# Altium PCB BBB_Board_Sandbox.PcbDoc
Units mil, origin at the board's own origin, x right, y up, seen from the top; angles counter-clockwise.
Board outline 11000 x 5000 mil, 2 copper layers (Top Layer, Bottom Layer); 106 components, 380 nets, 1052 pads, 0 vias.
Unrouted connection lines stored in the file: 662.
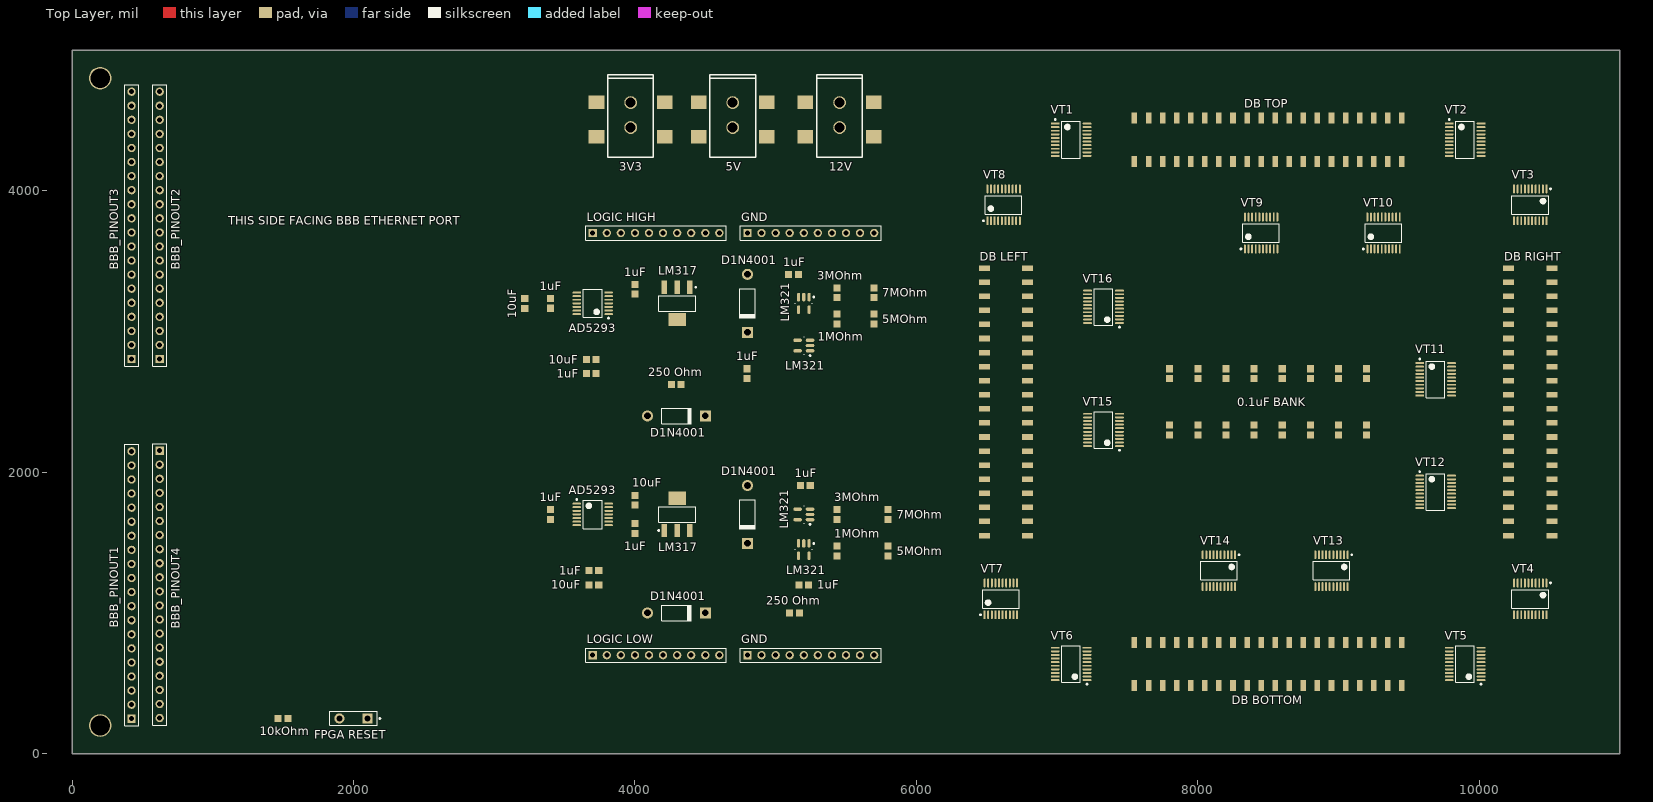
[diagram p0: Top Layer view]
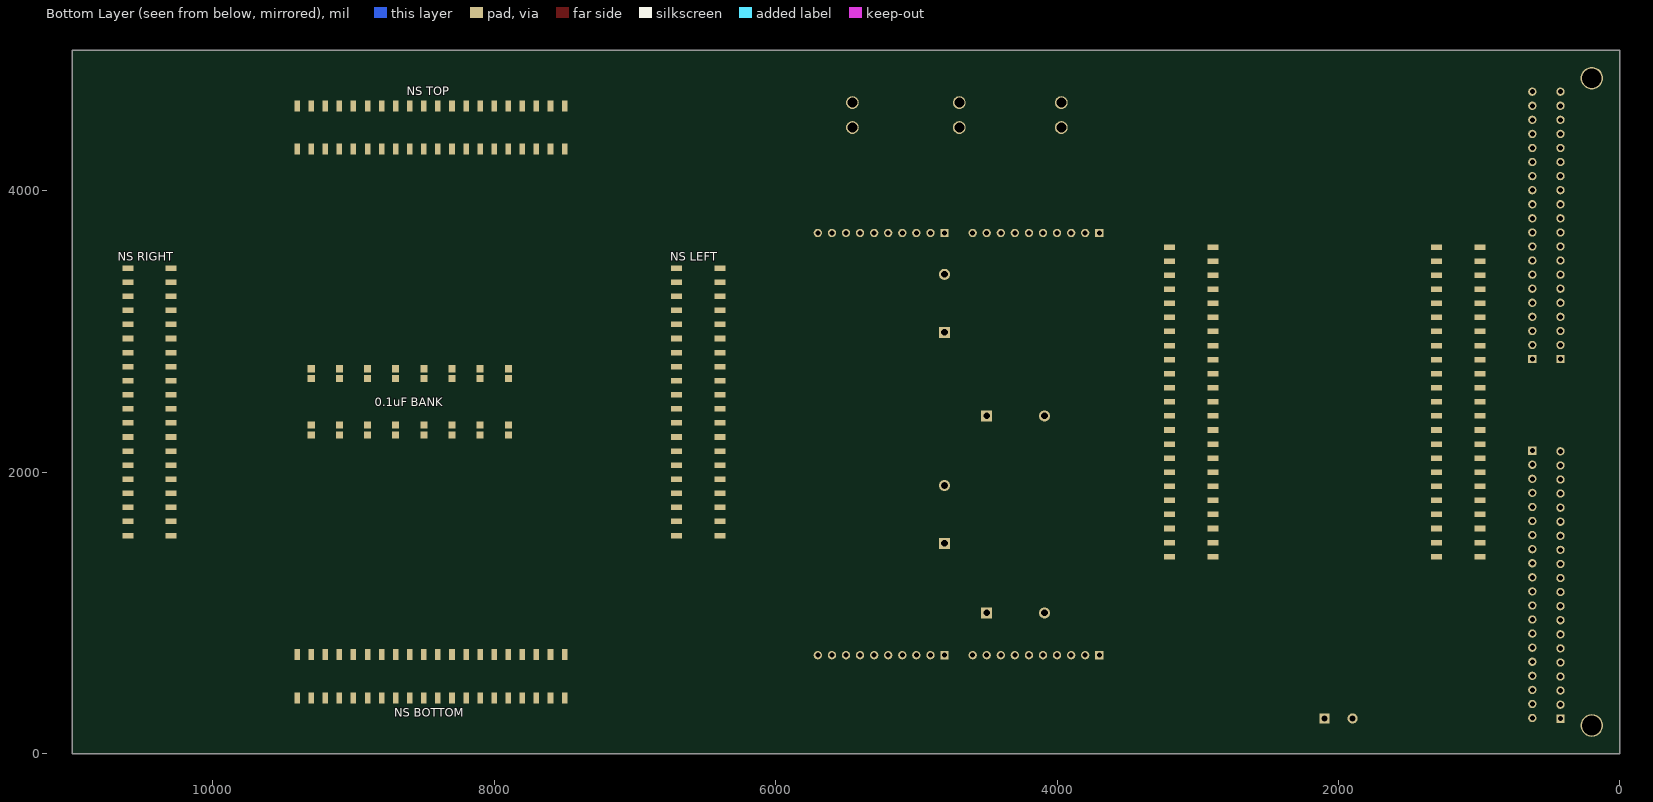
[diagram p1: Bottom Layer view, seen from below]

## Layer stack, top to bottom
Top Solder: solder mask 0.4, Solder Resist, Dk 3.5
Top Layer: signal copper 1.4
Dielectric 1: dielectric 12.6, FR-4, Dk 4.8
Bottom Layer: signal copper 1.4
Bottom Solder: solder mask 0.4, Solder Resist, Dk 3.5

## Board outline
0,0 11000,0 11000,5000 0,5000

## Design rules (kind name [scope] priority, off if disabled: settings)
Clearance DifferentViaPadClearance [IsPad vs IsVia] p1: gap=20
Clearance SameViaPadClearance [IsPad vs IsVia] p2: gap=20
Clearance DifferentViaViaClearance [IsVia vs IsVia] p3: gap=20
Clearance SameViaViaClearance [All] p4: gap=10
Clearance DifferentGeneralClearance [All] p5: gap=10
Clearance SameGeneralClearance [IsVia vs IsVia] p6: gap=20
HoleSize [All] p1: absolutevalues=TRUE maxlimit=150 minlimit=15 maxpercent=80.000 minpercent=20.000
MinimumAnnularRing [All] p1: minimumring=7
MinimumSolderMaskSliver [All] p1: minsoldermaskwidth=4
PolygonConnect [All] p1: connectstyle=Relief reliefconductorwidth=10 reliefentries=4 polygonreliefangle="90 Angle" airgapwidth=10
RoutingCorners [All] p1: cornerstyle=45-Degree minsetback=50 maxsetback=50
RoutingVias [All] p1: holewidth=15 width=30 viastyle="Through Hole" minholewidth=15 minwidth=30 maxholewidth=15 maxwidth=30
SolderMaskExpansion [All] p1: expansion=4
Width [All] p1: maxlimit=7 minlimit=7 preferedwidth=7
27 further rules are at their usual default settings.

## Classes and differential pairs
component class BBB_Board: 3V3 5V 10kOhm 12V BBB_PINOUT1 BBB_PINOUT2 BBB_PINOUT3 BBB_PINOUT4 "FPGA RESET" GND GND1 "LOGIC HIGH" "LOGIC LOW" ""
component class U_Power_Control1: 1MOhm 1uF 3MOhm 10uF "250 Ohm" AD5293 D1N4001 d2 LM321
component class U_Power_Control2: 1MOhm 1uF 3MOhm 10uF "250 Ohm" AD5293 D1N4001 LM317 LM321
component class U_VT_WRP1: VT11 ""
component class U_VT_WRP2: 0.1uF_3_U_VT_WRP2 LT1_U_VT_WRP2 LT2_U_VT_WRP2 ""
component class U_VT_WRP3: LT1_U_VT_WRP3 LT2_U_VT_WRP3 ""
component class U_VT_WRP4: LT1_U_VT_WRP4 LT2_U_VT_WRP4 ""
component class U_VT_WRP5: LT1_U_VT_WRP5 LT2_U_VT_WRP5 ""
component class U_VT_WRP6: 0.1uF_1_U_VT_WRP6 LT1_U_VT_WRP6 LT2_U_VT_WRP6 ""
component class U_VT_WRP7: LT1_U_VT_WRP7 LT2_U_VT_WRP7 ""
component class U_VT_WRP8: LT1_U_VT_WRP8 LT2_U_VT_WRP8 ""
net class IVL_B[127..0]: IVL_B0 IVL_B1 IVL_B2 IVL_B3 IVL_B4 IVL_B5 IVL_B6 IVL_B7 IVL_B8 IVL_B9 IVL_B10 IVL_B11 IVL_B12 IVL_B13 IVL_B14 IVL_B15 IVL_B16 IVL_B17 IVL_B18 IVL_B19 IVL_B20 IVL_B21 IVL_B22 IVL_B23 IVL_B24 IVL_B25 IVL_B26 IVL_B27 IVL_B28 IVL_B29 IVL_B30 IVL_B31 IVL_B32 IVL_B33 IVL_B34 IVL_B35 IVL_B36 IVL_B37 IVL_B38 IVL_B39 IVL_B40 IVL_B41 IVL_B42 IVL_B43 IVL_B44 IVL_B45 IVL_B46 IVL_B47 IVL_B48 IVL_B49 IVL_B50 IVL_B51 IVL_B52 IVL_B53 IVL_B54 IVL_B55 IVL_B56 IVL_B57 IVL_B58 IVL_B59 IVL_B60 IVL_B61 IVL_B62 IVL_B63 IVL_B64 IVL_B65 IVL_B66 IVL_B67 IVL_B68 IVL_B69 IVL_B70 IVL_B71 IVL_B72 IVL_B73 IVL_B74 IVL_B75 IVL_B76 IVL_B77 IVL_B78 IVL_B79 IVL_B80 IVL_B81 IVL_B82 IVL_B83 IVL_B84 IVL_B85 IVL_B86 IVL_B87 IVL_B88 IVL_B89 IVL_B90 IVL_B91 IVL_B92 IVL_B93 IVL_B94 IVL_B95 IVL_B96 IVL_B97 IVL_B98 IVL_B99 IVL_B100 IVL_B101 IVL_B102 IVL_B103 IVL_B104 IVL_B105 IVL_B106 IVL_B107 IVL_B108 IVL_B109 IVL_B110 IVL_B111 IVL_B112 IVL_B113 IVL_B114 IVL_B115 IVL_B116 IVL_B117 IVL_B118 IVL_B119 IVL_B120 IVL_B121 IVL_B122 IVL_B123 IVL_B124 IVL_B125 IVL_B126 IVL_B127
net class OVCC_B[127..0]: OVCC_B0 OVCC_B1 OVCC_B2 OVCC_B3 OVCC_B4 OVCC_B5 OVCC_B6 OVCC_B7 OVCC_B8 OVCC_B9 OVCC_B10 OVCC_B11 OVCC_B12 OVCC_B13 OVCC_B14 OVCC_B15 OVCC_B16 OVCC_B17 OVCC_B18 OVCC_B19 OVCC_B20 OVCC_B21 OVCC_B22 OVCC_B23 OVCC_B24 OVCC_B25 OVCC_B26 OVCC_B27 OVCC_B28 OVCC_B29 OVCC_B30 OVCC_B31 OVCC_B32 OVCC_B33 OVCC_B34 OVCC_B35 OVCC_B36 OVCC_B37 OVCC_B38 OVCC_B39 OVCC_B40 OVCC_B41 OVCC_B42 OVCC_B43 OVCC_B44 OVCC_B45 OVCC_B46 OVCC_B47 OVCC_B48 OVCC_B49 OVCC_B50 OVCC_B51 OVCC_B52 OVCC_B53 OVCC_B54 OVCC_B55 OVCC_B56 OVCC_B57 OVCC_B58 OVCC_B59 OVCC_B60 OVCC_B61 OVCC_B62 OVCC_B63 OVCC_B64 OVCC_B65 OVCC_B66 OVCC_B67 OVCC_B68 OVCC_B69 OVCC_B70 OVCC_B71 OVCC_B72 OVCC_B73 OVCC_B74 OVCC_B75 OVCC_B76 OVCC_B77 OVCC_B78 OVCC_B79 OVCC_B80 OVCC_B81 OVCC_B82 OVCC_B83 OVCC_B84 OVCC_B85 OVCC_B86 OVCC_B87 OVCC_B88 OVCC_B89 OVCC_B90 OVCC_B91 OVCC_B92 OVCC_B93 OVCC_B94 OVCC_B95 OVCC_B96 OVCC_B97 OVCC_B98 OVCC_B99 OVCC_B100 OVCC_B101 OVCC_B102 OVCC_B103 OVCC_B104 OVCC_B105 OVCC_B106 OVCC_B107 OVCC_B108 OVCC_B109 OVCC_B110 OVCC_B111 OVCC_B112 OVCC_B113 OVCC_B114 OVCC_B115 OVCC_B116 OVCC_B117 OVCC_B118 OVCC_B119 OVCC_B120 OVCC_B121 OVCC_B122 OVCC_B123 OVCC_B124 OVCC_B125 OVCC_B126 OVCC_B127
channel class DUT_HEADER: U_DUT_HEADER1 U_DUT_HEADER2 U_DUT_HEADER3 U_DUT_HEADER4
channel class POW_CONT: U_Power_Control1 U_Power_Control2
channel class VT_WRP: U_VT_WRP1 U_VT_WRP2 U_VT_WRP3 U_VT_WRP4 U_VT_WRP5 U_VT_WRP6 U_VT_WRP7 U_VT_WRP8
component class U_NUMATO_HDR: "NS BOTTOM" "NS LEFT" "NS RIGHT" "NS TOP"

## Components (designator, comment, footprint, x,y, rotation, side; value= is the part's Value field where it differs from the comment)
0.1uF_0 "0.1uF_0603" 0.1UF_0603 8300,2300 r270 bottom
0.1uF_0 "0.1uF_0603" 0.1UF_0603 9300,2300 r270 bottom
0.1uF_0 "0.1uF_0603" 0.1UF_0603 8900,2300 r270 bottom
0.1uF_0 "0.1uF_0603" 0.1UF_0603 8100,2700 r90 bottom
0.1uF_0 "0.1uF_0603" 0.1UF_0603 8700,2300 r270 bottom
0.1uF_0 "0.1uF_0603" 0.1UF_0603 8500,2300 r270 bottom
0.1uF_0 "0.1uF_0603" 0.1UF_0603 8100,2300 r270 bottom
0.1uF_0 "0.1uF_0603" 0.1UF_0603 7900,2300 r270 bottom
0.1uF_1 "0.1uF_0603" 0.1UF_0603 9300,2700 r90 bottom
0.1uF_1 "0.1uF_0603" 0.1UF_0603 9100,2700 r90 bottom
0.1uF_1 "0.1uF_0603" 0.1UF_0603 9100,2300 r270 bottom
0.1uF_1 "0.1uF_0603" 0.1UF_0603 8900,2700 r90 bottom
0.1uF_1 "0.1uF_0603" 0.1UF_0603 8700,2700 r90 bottom
0.1uF_1 "0.1uF_0603" 0.1UF_0603 8500,2700 r90 bottom
0.1uF_1 "" 0.1UF_0603 8300,2700 r90 bottom
0.1uF_1 "0.1uF_0603" 0.1UF_0603 7900,2700 r90 bottom
0.1uF_3 "0.1uF_0603" 0.1UF_0603 8800,2700 r90 top
0.1uF_3 "0.1uF_0603" 0.1UF_0603 9200,2300 r270 top
0.1uF_3 "0.1uF_0603" 0.1UF_0603 8600,2700 r90 top
0.1uF_3 "0.1uF_0603" 0.1UF_0603 9000,2300 r270 top
0.1uF_3 "0.1uF_0603" 0.1UF_0603 8800,2300 r270 top
0.1uF_3 "0.1uF_0603" 0.1UF_0603 8600,2300 r270 top
0.1uF_3 "0.1uF_0603" 0.1UF_0603 9000,2700 r90 top
0.1uF_3 "0.1uF_0603" 0.1UF_0603 8200,2700 r90 top
0.1uF_4 "0.1uF_0603" 0.1UF_0603 8400,2300 r270 top
0.1uF_4 "0.1uF_0603" 0.1UF_0603 8200,2300 r270 top
0.1uF_4 "0.1uF_0603" 0.1UF_0603 8400,2700 r90 top
0.1uF_4 "0.1uF_0603" 0.1UF_0603 8000,2300 r270 top
0.1uF_4 "0.1uF_0603" 0.1UF_0603 7800,2300 r270 top
0.1uF_4 "0.1uF_0603" 0.1UF_0603 7800,2700 r90 top
0.1uF_4 "0.1uF_0603" 0.1UF_0603 9200,2700 r270 top
0.1uF_4 "0.1uF_0603" 0.1UF_0603 8000,2700 r90 top
1MOhm "RNCS0603BKE10K0" 0.1UF_0603 5435,1440 r90 top (schematic designator R4)
1MOhm "RNCS0603BKE10K0" 0.1UF_0603 5435,3089 r90 top (schematic designator R4)
1uF "0.1uF_0603" 0.1UF_0603 5200,1200 r180 top (schematic designator 1)
1uF "0.1uF_0603" 0.1UF_0603 4795,2700 r270 top (schematic designator 1)
1uF "0.1uF_0603" 0.1UF_0603 5211,1906 r180 top (schematic designator 2)
1uF "0.1uF_0603" 0.1UF_0603 5128,3406 r180 top (schematic designator 2)
1uF "0.1uF_0603" 0.1UF_0603 3708,1300 r180 top (schematic designator 3)
1uF "0.1uF_0603" 0.1UF_0603 3690,2700 r180 top (schematic designator 4)
1uF "0.1uF_0603" 0.1UF_0603 3400,1700 r270 top (schematic designator 5)
1uF "0.1uF_0603" 0.1UF_0603 4000,3300 r90 top (schematic designator 5)
1uF "0.1uF_0603" 0.1UF_0603 4000,1600 r270 top (schematic designator 6)
1uF "0.1uF_0603" 0.1UF_0603 3400,3200 r90 top (schematic designator 6)
3MOhm "RNCS0603BKE10K0" 0.1UF_0603 5435,1700 r90 top (schematic designator R3)
3MOhm "RNCS0603BKE10K0" 0.1UF_0603 5435,3275 r90 top (schematic designator R3)
3V3 "PJ-002BH-SMT-TR" CP-002BHPJCT-ND 4147,4823 r180 top
5MOhm "RNCS0603BKE10K0" 0.1UF_0603 5800,1440 r270 top (schematic designator R5)
5MOhm "RNCS0603BKE10K0" 0.1UF_0603 5700,3089 r270 top (schematic designator R5)
5V "PJ-002BH-SMT-TR" CP-002BHPJCT-ND 4872,4823 r180 top (schematic designator -5V)
7MOhm "RNCS0603BKE10K0" 0.1UF_0603 5800,1700 r270 top (schematic designator R6)
7MOhm "RNCS0603BKE10K0" 0.1UF_0603 5700,3275 r270 top (schematic designator R6)
10kOhm "RNCS0603BKE10K0" 0.1UF_0603 1500,250 r0 top (schematic designator R1)
10uF "0.1uF_0603" 0.1uF_0603 3217,3199 r90 top (schematic designator 1uF_5)
10uF "0.1uF_0603" 0.1uF_0603 4001,1801 r270 top (schematic designator 1uF_5)
10uF "0.1uF_0603" 0.1UF_0603 3690,2800 r180 top (schematic designator 3)
10uF "0.1uF_0603" 0.1UF_0603 3708,1200 r180 top (schematic designator 4)
12V "PJ-002BH-SMT-TR" CP-002BHPJCT-ND 5632,4823 r180 top (schematic designator 12V.)
"250 Ohm" "RNCS0603BKE10K0" 0.1UF_0603 5133,1000 r180 top (schematic designator R2)
"250 Ohm" "RNCS0603BKE10K0" 0.1UF_0603 4294,2622 r0 top (schematic designator R2)
AD5293 "Digital Pot" DIG_POT 3700,1700 r0 top (schematic designator POT)
AD5293 "Digital Pot" DIG_POT 3700,3200 r180 top (schematic designator POT)
BBB_DOWN "BBB_Pin" BBB_PIN 3200,3600 r180 bottom
BBB_PINOUT1 "Header 20" HDR1X20 423,248 r90 top
BBB_PINOUT2 "Header 20" HDR1X20 623,2804 r90 top
BBB_PINOUT3 "Header 20" HDR1X20 423,2804 r90 top
BBB_PINOUT4 "Header 20" HDR1X20 623,2153 r270 top
D1N4001 "Diode 1N4001" DO-41 4800,1700 r270 top (schematic designator D1)
D1N4001 "Diode 1N4001" DO-41 4800,3200 r270 top (schematic designator D1)
D1N4001 "Diode 1N4001" DO-41 4295,1000 r0 top (schematic designator D2)
D1N4001 "Diode 1N4001" DO-41 4295,2400 r0 top (schematic designator D2)
"DB BOTTOM" "ADAFRUIT_HEADER" FEMALE_HEADER_SMD 8500,637.5 r0 top (schematic designator DUT1)
"DB LEFT" "ADAFRUIT_HEADER" FEMALE_HEADER_SMD 6637.5,2500 r270 top (schematic designator DUT1)
"DB RIGHT" "ADAFRUIT_HEADER" FEMALE_HEADER_SMD 10362.5,2500 r90 top (schematic designator DUT1)
"DB TOP" "ADAFRUIT_HEADER" FEMALE_HEADER_SMD 8500,4362.5 r180 top (schematic designator DUT1)
"FPGA RESET" "SW-PB" SPST-2 2000,250 r180 top (schematic designator S1)
GND "Header 10" HDR1X10 4800,3700 r0 top (schematic designator GND2)
GND "Header 10" HDR1X10 4800,700 r0 top (schematic designator GND1)
LM317 "Voltage Regulator" VOLT_REG 4300,1700 r90 top (schematic designator VR1)
LM317 "Voltage Regulator" VOLT_REG 4300,3200 r270 top (schematic designator VR1)
LM321 "LM321MF/NOPB" OP_AMP 5200,1700 r180 top (schematic designator LM1)
LM321 "LM321MF/NOPB" OP_AMP 5200,3200 r270 top (schematic designator LM1)
LM321 "LM321MF/NOPB" OP_AMP 5200,2900 r180 top (schematic designator LM2)
LM321 "LM321MF/NOPB" OP_AMP 5200,1450 r270 top (schematic designator LM2)
"LOGIC HIGH" "Header 10" HDR1X10 3700,3700 r0 top (schematic designator LOGIC_HIGH)
"LOGIC LOW" "Header 10" HDR1X10 3700,700 r0 top (schematic designator P1)
"NS BOTTOM" "ADAFRUIT_HEADER" FEMALE_HEADER_SMD 8450,550 r0 bottom (schematic designator ETH3)
"NS LEFT" "ADAFRUIT_HEADER" FEMALE_HEADER_SMD 6550,2500 r90 bottom (schematic designator ETH2)
"NS RIGHT" "ADAFRUIT_HEADER" FEMALE_HEADER_SMD 10450,2500 r270 bottom (schematic designator ETH4)
"NS TOP" "ADAFRUIT_HEADER" FEMALE_HEADER_SMD 8450,4450 r180 bottom (schematic designator ETH1)
VT1 "8-Chanel Level Translator" 8-BIT_LEVEL 7100,4362.5 r0 top (schematic designator LT1)
VT2 "8-Chanel Level Translator" 8-BIT_LEVEL 9900,4362.5 r0 top (schematic designator LT2)
VT3 "8-Chanel Level Translator" 8-BIT_LEVEL 10362.5,3900 r270 top (schematic designator LT2)
VT4 "8-Chanel Level Translator" 8-BIT_LEVEL 10362.5,1100 r270 top (schematic designator LT1)
VT5 "8-Chanel Level Translator" 8-BIT_LEVEL 9900,637.5 r180 top (schematic designator LT1)
VT6 "8-Chanel Level Translator" 8-BIT_LEVEL 7100,637.5 r180 top (schematic designator LT2)
VT7 "8-Chanel Level Translator" 8-BIT_LEVEL 6600,1100 r90 top (schematic designator LT2)
VT8 "8-Chanel Level Translator" 8-BIT_LEVEL 6620,3900 r90 top (schematic designator LT1)
VT9 "8-Chanel Level Translator" 8-BIT_LEVEL 8450,3700 r90 top (schematic designator LT1)
VT10 "8-Chanel Level Translator" 8-BIT_LEVEL 9320,3700 r90 top (schematic designator LT2)
VT11 "8-Chanel Level Translator" 8-BIT_LEVEL 9690,2660 r0 top (schematic designator LT1)
VT12 "8-Chanel Level Translator" 8-BIT_LEVEL 9690,1860 r0 top (schematic designator LT2)
VT13 "8-Chanel Level Translator" 8-BIT_LEVEL 8950,1300 r270 top (schematic designator LT1)
VT14 "8-Chanel Level Translator" 8-BIT_LEVEL 8150,1300 r270 top (schematic designator LT2)
VT15 "8-Chanel Level Translator" 8-BIT_LEVEL 7330,2300 r180 top (schematic designator LT1)
VT16 "8-Chanel Level Translator" 8-BIT_LEVEL 7330,3175 r180 top (schematic designator LT2)

## Footprints (in the part's own frame and the unit in brackets; to place one, negate y for a bottom-side part, rotate by r counter-clockwise, add the part's x,y. Pads: shape width x height; smd on the part's side, far side on the other; paste and mask are expansions set on the pad)
0.1UF_0603 [mil]
  rect 50x50 smd: 1(-35,0) 2(35,0)
0.1uF_0603 [mil]
  rect 50x50 smd: 1(-35,0) 2(35,0)
8-BIT_LEVEL [mm]
  oval 1.6x0.35 smd: 1(-2.875,2.925) 2(-2.875,2.275) 3(-2.875,1.625) 4(-2.875,0.975) 5(-2.875,0.325) 6(-2.875,-0.325) 7(-2.875,-0.975) 8(-2.875,-1.625) 9(-2.875,-2.275) 10(-2.875,-2.925) 11(2.875,-2.925) 12(2.875,-2.275) 13(2.875,-1.625) 14(2.875,-0.975) 15(2.875,-0.325) 16(2.875,0.325) 17(2.875,0.975) 18(2.875,1.625) 19(2.875,2.275) 20(2.875,2.925)
  silkscreen extent -3,-3.3 1.67,3.77, body extent -2.25,-3.3 2.25,3.3, height 1.1
BBB_PIN [mm]
  rect 2x1 smd: 1(55.986,0) 2(48.186,0) 3(55.986,-2.54) 4(48.186,-2.54) 5(55.986,-5.08) 6(48.186,-5.08) 7(55.986,-7.62) 8(48.186,-7.62) 9(55.986,-10.16) 10(48.186,-10.16) 11(55.986,-12.7) 12(48.186,-12.7) 13(55.986,-15.24) 14(48.186,-15.24) 15(55.986,-17.78) 16(48.186,-17.78) 17(55.986,-20.32) 18(48.186,-20.32) 19(55.986,-22.86) 20(48.186,-22.86) 21(55.986,-25.4) 22(48.186,-25.4) 23(55.986,-27.94) 24(48.186,-27.94) 25(55.986,-30.48) 26(48.186,-30.48) 27(55.986,-33.02) 28(48.186,-33.02) 29(55.986,-35.56) 30(48.186,-35.56) 31(55.986,-38.1) 32(48.186,-38.1) 33(55.986,-40.64) 34(48.186,-40.64) 35(55.986,-43.18) 36(48.186,-43.18) 37(55.986,-45.72) 38(48.186,-45.72) 39(55.986,-48.26) 40(48.186,-48.26) 41(55.986,-50.8) 42(48.186,-50.8) 43(55.986,-53.34) 44(48.186,-53.34) 45(55.986,-55.88) 46(48.186,-55.88) 47(7.8,0) 48(0,0) 49(7.8,-2.54) 50(0,-2.54) 51(7.8,-5.08) 52(0,-5.08) 53(7.8,-7.62) 54(0,-7.62) 56(0,-10.16) 57(7.8,-12.7) 58(0,-12.7) 59(7.8,-15.24) 60(0,-15.24) 61(7.8,-17.78) 62(0,-17.78) 63(7.8,-20.32) 64(0,-20.32) 65(7.8,-22.86) 66(0,-22.86) 67(7.8,-25.4) 68(0,-25.4) 69(7.8,-27.94) 70(0,-27.94) 71(7.8,-30.48) 72(0,-30.48) 73(7.8,-33.02) 74(0,-33.02) 75(7.8,-35.56) 76(0,-35.56) 77(7.8,-38.1) 78(0,-38.1) 79(7.8,-40.64) 80(0,-40.64) 81(7.8,-43.18) 82(0,-43.18) 83(7.8,-45.72) 84(0,-45.72) 85(7.8,-48.26) 86(0,-48.26) 87(7.8,-50.8) 88(0,-50.8) 89(7.8,-53.34) 90(0,-53.34) 91(7.8,-55.88) 92(0,-55.88)
  rect 2x1 smd mask+0.102: 55(7.8,-10.16)
CP-002BHPJCT-ND [mm] "barrel jack"
  rect 2.8x2.4 smd: 1(-1.651,11.176) 1(-1.651,4.953) 2(10.668,4.953) 3(10.668,11.176)
  round 2.311 hole 1.8 unplated: H(4.5,9.5) H(4.5,5)
  silkscreen extent 0.38,0 8.64,14.86
DIG_POT [mm]
  oval 1.55x0.35 smd: 1(-2.875,1.95) 2(-2.875,1.3) 3(-2.875,0.65) 4(-2.875,0) 5(-2.875,-0.65) 6(-2.875,-1.3) 7(-2.875,-1.95) 8(2.875,-1.95) 9(2.875,-1.3) 10(2.875,-0.65) 11(2.875,0) 12(2.875,0.65) 13(2.875,1.3) 14(2.875,1.95)
  silkscreen extent -3,-2.55 1.7,2.8, body extent -2.25,-2.55 2.25,2.55, height 1.2
DO-41 [mm] "Diode, Axial; Body 5.2 x 2.7 mm (LxDia. max), Lead Dia. 0.86 mm (max)"
  round 2 hole 1.2: 1(-5.23,0)
  rect 2x2 hole 1.2: 2(5.23,0)
  silkscreen extent -2.65,-1.4 2.74,1.4
FEMALE_HEADER_SMD [mm]
  rect 1x2 smd: 1(-24.13,-3.9) 2(-21.59,-3.9) 3(-19.05,-3.9) 4(-16.51,-3.9) 5(-13.97,-3.9) 6(-11.43,-3.9) 7(-8.89,-3.9) 8(-6.35,-3.9) 9(-3.81,-3.9) 10(-1.27,-3.9) 11(1.27,-3.9) 12(3.81,-3.9) 13(6.35,-3.9) 14(8.89,-3.9) 15(11.43,-3.9) 16(13.97,-3.9) 17(16.51,-3.9) 18(19.05,-3.9) 19(21.59,-3.9) 20(24.13,-3.9) 21(24.13,3.9) 22(21.59,3.9) 23(19.05,3.9) 24(16.51,3.9) 25(13.97,3.9) 26(11.43,3.9) 27(8.89,3.9) 28(6.35,3.9) 29(3.81,3.9) 30(1.27,3.9) 31(-1.27,3.9) 32(-3.81,3.9) 33(-6.35,3.9) 34(-8.89,3.9) 35(-11.43,3.9) 36(-13.97,3.9) 37(-16.51,3.9) 38(-19.05,3.9) 39(-21.59,3.9) 40(-24.13,3.9)
HDR1X10 [mm] "Connector; Header; 10 Position"
  rect 1.5x1.5 hole 0.9: 1(0,0)
  round 1.5 hole 0.9: 2(2.54,0) 3(5.08,0) 4(7.62,0) 5(10.16,0) 6(12.7,0) 7(15.24,0) 8(17.78,0) 9(20.32,0) 10(22.86,0)
  silkscreen extent -1.27,-1.27 24.13,1.27
HDR1X20 [mm] "Connector; Header; 20 Position"
  rect 1.5x1.5 hole 0.9: 1(0,0)
  round 1.5 hole 0.9: 2(2.54,0) 3(5.08,0) 4(7.62,0) 5(10.16,0) 6(12.7,0) 7(15.24,0) 8(17.78,0) 9(20.32,0) 10(22.86,0) 11(25.4,0) 12(27.94,0) 13(30.48,0) 14(33.02,0) 15(35.56,0) 16(38.1,0) 17(40.64,0) 18(43.18,0) 19(45.72,0) 20(48.26,0)
  silkscreen extent -1.27,-1.27 49.53,1.27
OP_AMP [mm]
  oval 1.55x0.6 smd: 1(-1.125,0.95) 2(-1.125,0) 3(-1.125,-0.95) 4(1.125,-0.95) 5(1.125,0.95)
  silkscreen extent -1.25,-1.55 0.05,1.92, body extent -0.9,-1.55 0.9,1.55, height 1.45
SPST-2 [mm] "Switch; 2 Leads"
  rect 1.85x1.85 hole 1.1: 1(-2.54,0)
  round 1.85 hole 1.1: 2(2.54,0)
  silkscreen extent -4.89,-1.27 4.28,1.27
VOLT_REG [mm] "SOT223, 4-Leads, Body 6.50x7.00mm (avg), Pitch 2.30mm, IPC Medium Density"
  rect 2.4x1 smd: 1(-2.9,2.3) 2(-2.9,0) 3(-2.9,-2.3)
  rect 2.4x3.2 smd: 4(2.9,0)
  silkscreen extent -3.02,-3.35 1.4,3.47, body extent -1.85,-3.35 1.85,3.35, height 1.8

## Part data
0.1uF_1: library part 0.1uF_0603
1MOhm 1MOhm 3MOhm 3MOhm 5MOhm 5MOhm 7MOhm 7MOhm 10kOhm "250 Ohm" "250 Ohm": "RES 10K OHM 1/16W 0.1% 0603"
3V3 5V 12V: "CONN POWER JACK 2.5X5.5MM HI CUR"
AD5293 AD5293: "IC DGTL POT 1024POS 20K 14TSSOP"
BBB_PINOUT1 BBB_PINOUT2 BBB_PINOUT3 BBB_PINOUT4: "Header, 20-Pin"
D1N4001 D1N4001 D1N4001 D1N4001: "1 Amp General Purpose Rectifier"
"DB BOTTOM" "DB LEFT" "DB RIGHT" "DB TOP" "NS BOTTOM" "NS LEFT" "NS RIGHT" "NS TOP": "Extra tall female header (SMD)"
"FPGA RESET": "Switch"
GND GND "LOGIC HIGH" "LOGIC LOW": "Header, 10-Pin"
LM317 LM317: "IC REG LDO ADJ 1.5A DDPAK"
LM321 LM321 LM321 LM321: "IC OPAMP GP 1MHZ SOT23-5"
VT1 VT2 VT3 VT4 VT5 VT6 VT7 VT8 VT9 VT10 VT11 VT12 VT13 VT14 VT15 VT16: "IC XLATR LEVEL BIDIR 8CH 20TSSOP"

## Free pads (board coordinates)
  round 160 hole 140 unplated: 0(200,200) 0(200,4800)

## Nets (pads, with @x,y where several pads share a name; then routed paths per layer and width w, separated by ;. In a path a pad name is that pad's centre, name@x,y a point inside that pad or via, vN(x,y) a via of type N, cw(c..) or ccw(c..) an arc to the next point about the centre after c; other vN are vias at no path point)
3V3: "DB LEFT.19" "FPGA RESET.1"
12V_W_U_Power_Control1: 1uF.2@3655,2700 1uF.2@3673,1300 5MOhm.2 10uF.2@3655,2800 10uF.2@3673,1200 12V.2 12V.3 AD5293.6 LM321.5@5155.71,2862.6 LM321.5@5237.4,1405.71
-5V_W_U_Power_Control1: 3MOhm.2 5V.1 LM321.2@5200,3244.29 LM321.2@5244.29,1700
BBB_\GND_ADC: BBB_DOWN.34
BBB_AIN0: BBB_DOWN.39 BBB_PINOUT2.17
BBB_AIN1: BBB_DOWN.40 BBB_PINOUT2.16
BBB_AIN2: BBB_DOWN.37 BBB_PINOUT2.19
BBB_AIN3: BBB_DOWN.38 BBB_PINOUT2.18
BBB_AIN4: BBB_DOWN.33 BBB_PINOUT1.3
BBB_AIN5: BBB_DOWN.36 BBB_PINOUT2.20
BBB_AIN6: BBB_DOWN.35 BBB_PINOUT1.1
BBB_DCS_DATA1: BBB_DOWN.92 BBB_PINOUT4.20
BBB_ECAPWMO: BBB_DOWN.42 BBB_PINOUT2.14
BBB_EHRPWM1A: BBB_DOWN.14 BBB_PINOUT1.10
BBB_EHRPWM1B: BBB_DOWN.16 BBB_PINOUT1.9
BBB_EHRPWM2A: BBB_DOWN.65 BBB_PINOUT3.18
BBB_EHRPWM2B: BBB_DOWN.59 BBB_PINOUT2.4
BBB_GND_ADC: BBB_PINOUT1.2
BBB_GPIO_20: BBB_DOWN.41 BBB_PINOUT2.15
BBB_GPIO_26: BBB_DOWN.60 BBB_PINOUT2.3
BBB_GPIO_27: BBB_DOWN.63 BBB_PINOUT3.20
BBB_GPIO_44: BBB_DOWN.58 BBB_PINOUT2.5
BBB_GPIO_45: BBB_DOWN.57 BBB_PINOUT2.6
BBB_GPIO_46: BBB_DOWN.62 BBB_PINOUT2.1
BBB_GPIO_47: BBB_DOWN.61 BBB_PINOUT2.2
BBB_GPIO_60: BBB_DOWN.13 BBB_PINOUT1.11
BBB_GPIO_61: BBB_DOWN.72 BBB_PINOUT3.11
BBB_GPIO_65: BBB_DOWN.64 BBB_PINOUT3.19
BBB_GPIO_66: BBB_DOWN.53 BBB_PINOUT2.9
BBB_GPIO_67: BBB_DOWN.54
BBB_GPIO_68: BBB_DOWN.56 BBB_PINOUT2.7
BBB_GPIO_69: BBB_DOWN.55 BBB_PINOUT2.8
BBB_GPIO_115: BBB_DOWN.27 BBB_PINOUT1.5
BBB_GPIO_117: BBB_DOWN.25 BBB_PINOUT1.6
BBB_I2C2_SCL: BBB_DOWN.19 BBB_PINOUT1.8
BBB_I2C_SDA: BBB_DOWN.20 BBB_PINOUT1.7
BBB_LCD_AC_BIAS: BBB_DOWN.76 BBB_PINOUT4.4
BBB_LCD_DATA0: BBB_DOWN.91 BBB_PINOUT4.19
BBB_LCD_DATA2: BBB_DOWN.89 BBB_PINOUT4.17
BBB_LCD_DATA3: BBB_DOWN.90 BBB_PINOUT4.18
BBB_LCD_DATA4: BBB_DOWN.87 BBB_PINOUT4.15
BBB_LCD_DATA5: BBB_DOWN.88 BBB_PINOUT4.16
BBB_LCD_DATA6: BBB_DOWN.85 BBB_PINOUT4.13
BBB_LCD_DATA7: BBB_DOWN.86 BBB_PINOUT4.14
BBB_LCD_DATA8: BBB_DOWN.83 BBB_PINOUT4.11
BBB_LCD_DATA9: BBB_DOWN.84 BBB_PINOUT4.12
BBB_LCD_DATA10: BBB_DOWN.82 BBB_PINOUT4.10
BBB_LCD_DATA11: BBB_DOWN.80 BBB_PINOUT4.8
BBB_LCD_DATA12: BBB_DOWN.81 BBB_PINOUT4.9
BBB_LCD_DATA13: BBB_DOWN.79 BBB_PINOUT4.7
BBB_LCD_DATA14: BBB_DOWN.77 BBB_PINOUT4.5
BBB_LCD_DATA15: BBB_DOWN.78 BBB_PINOUT4.6
BBB_LCD_HSYNC: BBB_DOWN.75 BBB_PINOUT4.3
BBB_LCD_PCLK: BBB_DOWN.74 BBB_PINOUT4.2
BBB_LCD_VSYNC: BBB_DOWN.73 BBB_PINOUT4.1
BBB_MMC1_CLK: BBB_DOWN.67 BBB_PINOUT3.16
BBB_MMC1_CMD: BBB_DOWN.66 BBB_PINOUT3.17
BBB_MMC1_DAT0: BBB_DOWN.71 BBB_PINOUT3.12
BBB_MMC1_DAT1: BBB_DOWN.70 BBB_PINOUT3.13
BBB_MMC1_DAT2: BBB_DOWN.51 BBB_PINOUT2.11
BBB_MMC1_DAT3: BBB_DOWN.52 BBB_PINOUT2.10
BBB_MMC1_DAT4: BBB_DOWN.69 BBB_PINOUT3.14
BBB_MMC1_DAT5: BBB_DOWN.68 BBB_PINOUT3.15
BBB_MMC1_DAT6: BBB_DOWN.49 BBB_PINOUT2.13
BBB_MMC1_DAT7: BBB_DOWN.50 BBB_PINOUT2.12
BBB_PWR_BUT: BBB_DOWN.9 BBB_PINOUT1.14
BBB_SYS_5V: BBB_DOWN.7 BBB_DOWN.8 BBB_PINOUT1.15 BBB_PINOUT1.16
BBB_SYS_RST: BBB_DOWN.10 BBB_PINOUT1.13
BBB_UART4_RXD: BBB_DOWN.11 BBB_PINOUT1.12
BBB_VDD_3V3: BBB_DOWN.3 BBB_DOWN.4 BBB_PINOUT1.19 BBB_PINOUT1.20
BBB_VDD_5V: BBB_DOWN.5 BBB_DOWN.6 BBB_PINOUT1.17 BBB_PINOUT1.18
BBB_VDD_ADC: BBB_DOWN.32 BBB_PINOUT1.4
COUNTER_CLK0: "DB TOP.24" "NS RIGHT.35"
COUNTER_CLK1: "DB BOTTOM.24" "NS RIGHT.25"
COUNTER_CLK2: "DB LEFT.24" "NS RIGHT.22"
COUNTER_CLK3: "DB RIGHT.24" "NS RIGHT.21"
COUNTER_CLR: "DB TOP.23" "NS RIGHT.36"
DIN0: AD5293.10@3586.81,3225.59 BBB_DOWN.21
DIN1: AD5293.10@3813.19,1674.41 BBB_DOWN.29
EN: "DB TOP.22" "NS RIGHT.37" VT1.10 VT2.10 VT3.10 VT4.10 VT5.10 VT6.10 VT7.10 VT8.10 VT9.10 VT10.10 VT11.10 VT12.10 VT13.10 VT14.10 VT15.10 VT16.10
FPGA_Q: "DB BOTTOM.20" "NS RIGHT.18"
FPGA_RX: "NS RIGHT.16" BBB_DOWN.26
FPGA_SHCP: "DB BOTTOM.22" "NS RIGHT.29"
FPGA_STCP: "DB BOTTOM.23" "NS RIGHT.28"
FPGA_TX: "NS RIGHT.17" BBB_DOWN.24
FPGA_~CS1: "DB TOP.17" "NS RIGHT.40"
FPGA_~CS2: "DB LEFT.17" "NS RIGHT.27"
FPGA_~CS3: "DB RIGHT.17" "NS RIGHT.24"
FPGA_~CS4: "DB BOTTOM.17" "NS RIGHT.34"
FPGA_~MR: "DB BOTTOM.19" "NS RIGHT.32"
FPGA_~OE: "DB TOP.18" "NS RIGHT.39"
FPGA_~PL: "DB BOTTOM.21" "NS RIGHT.31"
FPGA_~WE1: "DB TOP.19" "NS RIGHT.38"
FPGA_~WE2: "DB LEFT.18" "NS RIGHT.26"
FPGA_~WE3: "DB RIGHT.18" "NS RIGHT.23"
FPGA_~WE4: "DB BOTTOM.18" "NS RIGHT.33"
GLOBAL_3V3: 0.1uF_0.1 0.1uF_1.1 1uF.2@3400,3235 1uF.2@4000,1565 3V3.2 3V3.3 10uF.2@3217,3234 10uF.2@4001,1766 AD5293.8 VT1.2 VT2.2 VT3.2 VT4.2 VT5.2 VT6.2 VT7.2 VT8.2 VT9.2 VT10.2 VT11.2 VT12.2 VT13.2 VT14.2 VT15.2 VT16.2
GLOBAL_HIGH_POWER: 0.1uF_3.1 0.1uF_4.1 1uF.2@5093,3406 "250 Ohm.2"@4329,2622 "DB LEFT.23" "LOGIC HIGH.1" "LOGIC HIGH.2" "LOGIC HIGH.3" "LOGIC HIGH.4" "LOGIC HIGH.5" "LOGIC HIGH.6" "LOGIC HIGH.7" "LOGIC HIGH.8" "LOGIC HIGH.9" "LOGIC HIGH.10" D1N4001.1@4800,3405.91 D1N4001.2@4500.91,2400 LM317.2@4300,3314.17 LM317.4@4300,3085.83 VT1.19 VT2.19 VT3.19 VT4.19 VT5.19 VT6.19 VT7.19 VT8.19 VT9.19 VT10.19 VT11.19 VT12.19 VT13.19 VT14.19 VT15.19 VT16.19
GLOBAL_LOW_POWER: 0.1uF_0.2 0.1uF_1.2 0.1uF_3.2 0.1uF_4.2 1uF.2@5176,1906 "250 Ohm.2"@5098,1000 "LOGIC LOW.1" "LOGIC LOW.2" "LOGIC LOW.3" "LOGIC LOW.4" "LOGIC LOW.5" "LOGIC LOW.6" "LOGIC LOW.7" "LOGIC LOW.8" "LOGIC LOW.9" "LOGIC LOW.10" D1N4001.1@4800,1905.91 D1N4001.2@4500.91,1000 LM317.2@4300,1585.83 LM317.4@4300,1814.17 VT1.11 VT2.11 VT3.11 VT4.11 VT5.11 VT6.11 VT7.11 VT8.11 VT9.11 VT10.11 VT11.11 VT12.11 VT13.11 VT14.11 VT15.11 VT16.11
GND: 1MOhm.1 1uF.1@3400,1735 1uF.1@3400,3165 1uF.1@3725,2700 1uF.1@3743,1300 1uF.1@4000,1635 1uF.1@4000,3265 3V3.1 5V.2 5V.3 7MOhm.1 10kOhm.1 10uF.1 12V.1 "DB LEFT.20" "DB LEFT.21" "DB LEFT.22" "DB RIGHT.19" "DB RIGHT.20" "DB RIGHT.21" "DB RIGHT.22" "DB RIGHT.23" "DB TOP.20" "DB TOP.21" "NS BOTTOM.17" "NS BOTTOM.18" "NS BOTTOM.19" "NS BOTTOM.20" "NS BOTTOM.21" "NS BOTTOM.22" "NS BOTTOM.23" "NS BOTTOM.24" "NS RIGHT.11" "NS RIGHT.30" AD5293.2 AD5293.9 BBB_DOWN.1 BBB_DOWN.2 BBB_DOWN.43 BBB_DOWN.44 BBB_DOWN.45 BBB_DOWN.46 BBB_DOWN.47 BBB_DOWN.48 BBB_PINOUT3.1 BBB_PINOUT3.2 BBB_PINOUT3.3 BBB_PINOUT3.4 BBB_PINOUT3.5 BBB_PINOUT3.6 BBB_PINOUT3.7 BBB_PINOUT3.8 BBB_PINOUT3.9 BBB_PINOUT3.10 GND.1 GND.2 GND.3 GND.4 GND.5 GND.6 GND.7 GND.8 GND.9 GND.10 LM321.2@5200,1494.29 LM321.2@5244.29,2900
IVL_B0: "NS TOP.1" VT1.1
IVL_B1: "NS TOP.2" VT1.3
IVL_B2: "NS TOP.3" VT1.4
IVL_B3: "NS TOP.4" VT1.5
IVL_B4: "NS TOP.5" VT1.6
IVL_B5: "NS TOP.6" VT1.7
IVL_B6: "NS TOP.7" VT1.8
IVL_B7: "NS TOP.8" VT1.9
IVL_B8: "NS TOP.9" VT2.1
IVL_B9: "NS TOP.10" VT2.3
IVL_B10: "NS TOP.11" VT2.4
IVL_B11: "NS TOP.12" VT2.5
IVL_B12: "NS TOP.13" VT2.6
IVL_B13: "NS TOP.14" VT2.7
IVL_B14: "NS TOP.15" VT2.8
IVL_B15: "NS TOP.16" VT2.9
IVL_B16: "NS TOP.17" VT9.1
IVL_B17: "NS TOP.18" VT9.3
IVL_B18: "NS TOP.19" VT9.4
IVL_B19: "NS TOP.20" VT9.5
IVL_B20: "NS TOP.21" VT9.6
IVL_B21: "NS TOP.22" VT9.7
IVL_B22: "NS TOP.23" VT9.8
IVL_B23: "NS TOP.24" VT9.9
IVL_B24: "NS TOP.25" VT10.1
IVL_B25: "NS TOP.26" VT10.3
IVL_B26: "NS TOP.27" VT10.4
IVL_B27: "NS TOP.28" VT10.5
IVL_B28: "NS TOP.29" VT10.6
IVL_B29: "NS TOP.30" VT10.7
IVL_B30: "NS TOP.31" VT10.8
IVL_B31: "NS TOP.32" VT10.9
IVL_B32: "NS TOP.33" VT5.1
IVL_B33: "NS TOP.34" VT5.3
IVL_B34: "NS TOP.35" VT5.4
IVL_B35: "NS TOP.36" VT5.5
IVL_B36: "NS TOP.37" VT5.6
IVL_B37: "NS TOP.38" VT5.7
IVL_B38: "NS TOP.39" VT5.8
IVL_B39: "NS TOP.40" VT5.9
IVL_B40: "NS LEFT.1" VT6.1
IVL_B41: "NS LEFT.2" VT6.3
IVL_B42: "NS LEFT.3" VT6.4
IVL_B43: "NS LEFT.4" VT6.5
IVL_B44: "NS LEFT.5" VT6.6
IVL_B45: "NS LEFT.6" VT6.7
IVL_B46: "NS LEFT.7" VT6.8
IVL_B47: "NS LEFT.8" VT6.9
IVL_B48: "NS LEFT.9" VT13.1
IVL_B49: "NS LEFT.10" VT13.3
IVL_B50: "NS LEFT.11" VT13.4
IVL_B51: "NS LEFT.12" VT13.5
IVL_B52: "NS LEFT.13" VT13.6
IVL_B53: "NS LEFT.14" VT13.7
IVL_B54: "NS LEFT.15" VT13.8
IVL_B55: "NS LEFT.16" VT13.9
IVL_B56: "NS LEFT.17" VT14.1
IVL_B57: "NS LEFT.18" VT14.3
IVL_B58: "NS LEFT.19" VT14.4
IVL_B59: "NS LEFT.20" VT14.5
IVL_B60: "NS LEFT.21" VT14.6
IVL_B61: "NS LEFT.22" VT14.7
IVL_B62: "NS LEFT.23" VT14.8
IVL_B63: "NS LEFT.24" VT14.9
IVL_B64: "NS LEFT.25" VT8.1
IVL_B65: "NS LEFT.26" VT8.3
IVL_B66: "NS LEFT.27" VT8.4
IVL_B67: "NS LEFT.28" VT8.5
IVL_B68: "NS LEFT.29" VT8.6
IVL_B69: "NS LEFT.30" VT8.7
IVL_B70: "NS LEFT.31" VT8.8
IVL_B71: "NS LEFT.32" VT8.9
IVL_B72: "NS LEFT.33" VT7.1
IVL_B73: "NS LEFT.34" VT7.3
IVL_B74: "NS LEFT.35" VT7.4
IVL_B75: "NS LEFT.36" VT7.5
IVL_B76: "NS LEFT.37" VT7.6
IVL_B77: "NS LEFT.38" VT7.7
IVL_B78: "NS LEFT.39" VT7.8
IVL_B79: "NS LEFT.40" VT7.9
IVL_B80: "NS BOTTOM.1" VT15.1
IVL_B81: "NS BOTTOM.2" VT15.3
IVL_B82: "NS BOTTOM.3" VT15.4
IVL_B83: "NS BOTTOM.4" VT15.5
IVL_B84: "NS BOTTOM.5" VT15.6
IVL_B85: "NS BOTTOM.6" VT15.7
IVL_B86: "NS BOTTOM.7" VT15.8
IVL_B87: "NS BOTTOM.8" VT15.9
IVL_B88: "NS BOTTOM.9" VT16.1
IVL_B89: "NS BOTTOM.10" VT16.3
IVL_B90: "NS BOTTOM.11" VT16.4
IVL_B91: "NS BOTTOM.12" VT16.5
IVL_B92: "NS BOTTOM.13" VT16.6
IVL_B93: "NS BOTTOM.14" VT16.7
IVL_B94: "NS BOTTOM.15" VT16.8
IVL_B95: "NS BOTTOM.16" VT16.9
IVL_B96: "NS BOTTOM.25" VT4.1
IVL_B97: "NS BOTTOM.26" VT4.3
IVL_B98: "NS BOTTOM.27" VT4.4
IVL_B99: "NS BOTTOM.28" VT4.5
IVL_B100: "NS BOTTOM.29" VT4.6
IVL_B101: "NS BOTTOM.30" VT4.7
IVL_B102: "NS BOTTOM.31" VT4.8
IVL_B103: "NS BOTTOM.32" VT4.9
IVL_B104: "NS BOTTOM.33" VT3.1
IVL_B105: "NS BOTTOM.34" VT3.3
IVL_B106: "NS BOTTOM.35" VT3.4
IVL_B107: "NS BOTTOM.36" VT3.5
IVL_B108: "NS BOTTOM.37" VT3.6
IVL_B109: "NS BOTTOM.38" VT3.7
IVL_B110: "NS BOTTOM.39" VT3.8
IVL_B111: "NS BOTTOM.40" VT3.9
IVL_B112: "NS RIGHT.1" VT11.1
IVL_B113: "NS RIGHT.2" VT11.3
IVL_B114: "NS RIGHT.3" VT11.4
IVL_B115: "NS RIGHT.4" VT11.5
IVL_B116: "NS RIGHT.5" VT11.6
IVL_B117: "NS RIGHT.6" VT11.7
IVL_B118: "NS RIGHT.7" VT11.8
IVL_B119: "NS RIGHT.8" VT11.9
IVL_B120: "NS RIGHT.9" VT12.1
IVL_B121: "NS RIGHT.10" VT12.3
IVL_B122: "NS RIGHT.12" VT12.4
IVL_B123: "NS RIGHT.13" VT12.5
IVL_B124: "NS RIGHT.14" VT12.6
IVL_B125: "NS RIGHT.15" VT12.7
IVL_B126: VT12.8
IVL_B127: VT12.9
Net1_U_Power_Control1_2: 1uF.2@5165,1200 "250 Ohm.1"@5168,1000 AD5293.4@3586.81,1700 D1N4001.1@4089.09,1000 LM317.1@4209.45,1585.83
Net1_U_Power_Control2_2: 1uF.2@4795,2665 "250 Ohm.1"@4259,2622 AD5293.4@3813.19,3200 D1N4001.1@4089.09,2400 LM317.1@4390.55,3314.17
Net5_U_Power_Control1_2: 1uF.2@3400,1665 AD5293.7@3586.81,1623.23
Net5_U_Power_Control2_2: 1uF.2@4000,3335 AD5293.7@3813.19,3276.77
NetLM1_U_Power_Control1_1: 1MOhm.2@5435,1475 3MOhm.1@5435,1665 LM321.1@5244.29,1662.6
NetLM1_U_Power_Control2_1: 1MOhm.2@5435,3124 3MOhm.1@5435,3240 LM321.1@5237.4,3244.29
NetLM2_U_Power_Control1_1: 5MOhm.1@5800,1475 7MOhm.2@5800,1665 LM321.1@5237.4,1494.29
NetLM2_U_Power_Control2_1: 5MOhm.1@5700,3124 7MOhm.2@5700,3240 LM321.1@5244.29,2862.6
OTHER_W20: "NS RIGHT.20"
OTHER_W21: 10kOhm.2 "FPGA RESET.2" "NS RIGHT.19"
OUT1_U_Power_Control1: 1uF.1@5235,1200 1uF.1@5246,1906 AD5293.3@3586.81,1725.59 LM321.3@5244.29,1737.4 LM321.4@5155.71,1737.4
OUT1_U_Power_Control2: 1uF.1@4795,2735 1uF.1@5163,3406 AD5293.3@3813.19,3174.41 LM321.3@5162.6,3244.29 LM321.4@5162.6,3155.71
OUT2_U_Power_Control1: D1N4001.2@4800,1494.09 LM317.3@4390.55,1585.83 LM321.3@5162.6,1494.29 LM321.4@5162.6,1405.71 LM321.5@5155.71,1662.6
OUT2_U_Power_Control2: D1N4001.2@4800,2994.09 LM317.3@4209.45,3314.17 LM321.3@5244.29,2937.4 LM321.4@5155.71,2937.4 LM321.5@5237.4,3155.71
OVCC_B0: "DB TOP.1" VT1.20
OVCC_B1: "DB TOP.2" VT1.18
OVCC_B2: "DB TOP.3" VT1.17
OVCC_B3: "DB TOP.4" VT1.16
OVCC_B4: "DB TOP.5" VT1.15
OVCC_B5: "DB TOP.6" VT1.14
OVCC_B6: "DB TOP.7" VT1.13
OVCC_B7: "DB TOP.8" VT1.12
OVCC_B8: "DB TOP.9" VT2.20
OVCC_B9: "DB TOP.10" VT2.18
OVCC_B10: "DB TOP.11" VT2.17
OVCC_B11: "DB TOP.12" VT2.16
OVCC_B12: "DB TOP.13" VT2.15
OVCC_B13: "DB TOP.14" VT2.14
OVCC_B14: "DB TOP.15" VT2.13
OVCC_B15: "DB TOP.16" VT2.12
OVCC_B16: "DB TOP.25" VT9.20
OVCC_B17: "DB TOP.26" VT9.18
OVCC_B18: "DB TOP.27" VT9.17
OVCC_B19: "DB TOP.28" VT9.16
OVCC_B20: "DB TOP.29" VT9.15
OVCC_B21: "DB TOP.30" VT9.14
OVCC_B22: "DB TOP.31" VT9.13
OVCC_B23: "DB TOP.32" VT9.12
OVCC_B24: "DB TOP.33" VT10.20
OVCC_B25: "DB TOP.34" VT10.18
OVCC_B26: "DB TOP.35" VT10.17
OVCC_B27: "DB TOP.36" VT10.16
OVCC_B28: "DB TOP.37" VT10.15
OVCC_B29: "DB TOP.38" VT10.14
OVCC_B30: "DB TOP.39" VT10.13
OVCC_B31: "DB TOP.40" VT10.12
OVCC_B32: "DB BOTTOM.1" VT5.20
OVCC_B33: "DB BOTTOM.2" VT5.18
OVCC_B34: "DB BOTTOM.3" VT5.17
OVCC_B35: "DB BOTTOM.4" VT5.16
OVCC_B36: "DB BOTTOM.5" VT5.15
OVCC_B37: "DB BOTTOM.6" VT5.14
OVCC_B38: "DB BOTTOM.7" VT5.13
OVCC_B39: "DB BOTTOM.8" VT5.12
OVCC_B40: "DB BOTTOM.9" VT6.20
OVCC_B41: "DB BOTTOM.10" VT6.18
OVCC_B42: "DB BOTTOM.11" VT6.17
OVCC_B43: "DB BOTTOM.12" VT6.16
OVCC_B44: "DB BOTTOM.13" VT6.15
OVCC_B45: "DB BOTTOM.14" VT6.14
OVCC_B46: "DB BOTTOM.15" VT6.13
OVCC_B47: "DB BOTTOM.16" VT6.12
OVCC_B48: "DB BOTTOM.25" VT13.20
OVCC_B49: "DB BOTTOM.26" VT13.18
OVCC_B50: "DB BOTTOM.27" VT13.17
OVCC_B51: "DB BOTTOM.28" VT13.16
OVCC_B52: "DB BOTTOM.29" VT13.15
OVCC_B53: "DB BOTTOM.30" VT13.14
OVCC_B54: "DB BOTTOM.31" VT13.13
OVCC_B55: "DB BOTTOM.32" VT13.12
OVCC_B56: "DB BOTTOM.33" VT14.20
OVCC_B57: "DB BOTTOM.34" VT14.18
OVCC_B58: "DB BOTTOM.35" VT14.17
OVCC_B59: "DB BOTTOM.36" VT14.16
OVCC_B60: "DB BOTTOM.37" VT14.15
OVCC_B61: "DB BOTTOM.38" VT14.14
OVCC_B62: "DB BOTTOM.39" VT14.13
OVCC_B63: "DB BOTTOM.40" VT14.12
OVCC_B64: "DB LEFT.1" VT8.20
OVCC_B65: "DB LEFT.2" VT8.18
OVCC_B66: "DB LEFT.3" VT8.17
OVCC_B67: "DB LEFT.4" VT8.16
OVCC_B68: "DB LEFT.5" VT8.15
OVCC_B69: "DB LEFT.6" VT8.14
OVCC_B70: "DB LEFT.7" VT8.13
OVCC_B71: "DB LEFT.8" VT8.12
OVCC_B72: "DB LEFT.9" VT7.20
OVCC_B73: "DB LEFT.10" VT7.18
OVCC_B74: "DB LEFT.11" VT7.17
OVCC_B75: "DB LEFT.12" VT7.16
OVCC_B76: "DB LEFT.13" VT7.15
OVCC_B77: "DB LEFT.14" VT7.14
OVCC_B78: "DB LEFT.15" VT7.13
OVCC_B79: "DB LEFT.16" VT7.12
OVCC_B80: "DB LEFT.25" VT15.20
OVCC_B81: "DB LEFT.26" VT15.18
OVCC_B82: "DB LEFT.27" VT15.17
OVCC_B83: "DB LEFT.28" VT15.16
OVCC_B84: "DB LEFT.29" VT15.15
OVCC_B85: "DB LEFT.30" VT15.14
OVCC_B86: "DB LEFT.31" VT15.13
OVCC_B87: "DB LEFT.32" VT15.12
OVCC_B88: "DB LEFT.33" VT16.20
OVCC_B89: "DB LEFT.34" VT16.18
OVCC_B90: "DB LEFT.35" VT16.17
OVCC_B91: "DB LEFT.36" VT16.16
OVCC_B92: "DB LEFT.37" VT16.15
OVCC_B93: "DB LEFT.38" VT16.14
OVCC_B94: "DB LEFT.39" VT16.13
OVCC_B95: "DB LEFT.40" VT16.12
OVCC_B96: "DB RIGHT.1" VT4.20
OVCC_B97: "DB RIGHT.2" VT4.18
OVCC_B98: "DB RIGHT.3" VT4.17
OVCC_B99: "DB RIGHT.4" VT4.16
OVCC_B100: "DB RIGHT.5" VT4.15
OVCC_B101: "DB RIGHT.6" VT4.14
OVCC_B102: "DB RIGHT.7" VT4.13
OVCC_B103: "DB RIGHT.8" VT4.12
OVCC_B104: "DB RIGHT.9" VT3.20
OVCC_B105: "DB RIGHT.10" VT3.18
OVCC_B106: "DB RIGHT.11" VT3.17
OVCC_B107: "DB RIGHT.12" VT3.16
OVCC_B108: "DB RIGHT.13" VT3.15
OVCC_B109: "DB RIGHT.14" VT3.14
OVCC_B110: "DB RIGHT.15" VT3.13
OVCC_B111: "DB RIGHT.16" VT3.12
OVCC_B112: "DB RIGHT.25" VT11.20
OVCC_B113: "DB RIGHT.26" VT11.18
OVCC_B114: "DB RIGHT.27" VT11.17
OVCC_B115: "DB RIGHT.28" VT11.16
OVCC_B116: "DB RIGHT.29" VT11.15
OVCC_B117: "DB RIGHT.30" VT11.14
OVCC_B118: "DB RIGHT.31" VT11.13
OVCC_B119: "DB RIGHT.32" VT11.12
OVCC_B120: "DB RIGHT.33" VT12.20
OVCC_B121: "DB RIGHT.34" VT12.18
OVCC_B122: "DB RIGHT.35" VT12.17
OVCC_B123: "DB RIGHT.36" VT12.16
OVCC_B124: "DB RIGHT.37" VT12.15
OVCC_B125: "DB RIGHT.38" VT12.14
OVCC_B126: "DB RIGHT.39" VT12.13
OVCC_B127: "DB RIGHT.40" VT12.12
RDY0: AD5293.14@3586.81,3123.23 BBB_DOWN.15
RDY1: AD5293.14@3813.19,1776.77 BBB_DOWN.23
SCLK_W_U_Power_Control1: AD5293.11@3813.19,1700
SCLK_W_U_Power_Control2: AD5293.11@3586.81,3200 BBB_DOWN.22
SDO_W_U_Power_Control1: AD5293.13@3813.19,1751.18 BBB_DOWN.18 BBB_DOWN.30
SDO_W_U_Power_Control2: AD5293.13@3586.81,3148.82
SPI1_SCLK: BBB_DOWN.31
SPICS0: AD5293.12 BBB_DOWN.17
SPICS1: BBB_DOWN.28
V_RST: AD5293.1 BBB_DOWN.12
pads on no net: 3V3.H 5V.H 12V.H AD5293.5

## Silkscreen, mask and mechanical layers (free items; w line width, h text height)
Top Overlay:
  text "THIS SIDE FACING BBB ETHERNET PORT" at 1110,3760 h60
  text "0.1uF BANK" at 8281,2469 h60
Bottom Overlay:
  text "0.1uF BANK" at 8849,2470 h60
Mechanical 3:
  the board outline again, w10